# Altium PCB 856.PcbDoc
Units mil, origin at the board's own origin, x right, y up, seen from the top; angles counter-clockwise.
Board outline 3891 x 4990 mil, 4 copper layers (ANALOG, GND, POWER, DIGITAL), stack 30.635 mil thick; 20 components, 53 nets, 248 pads, 0 vias.
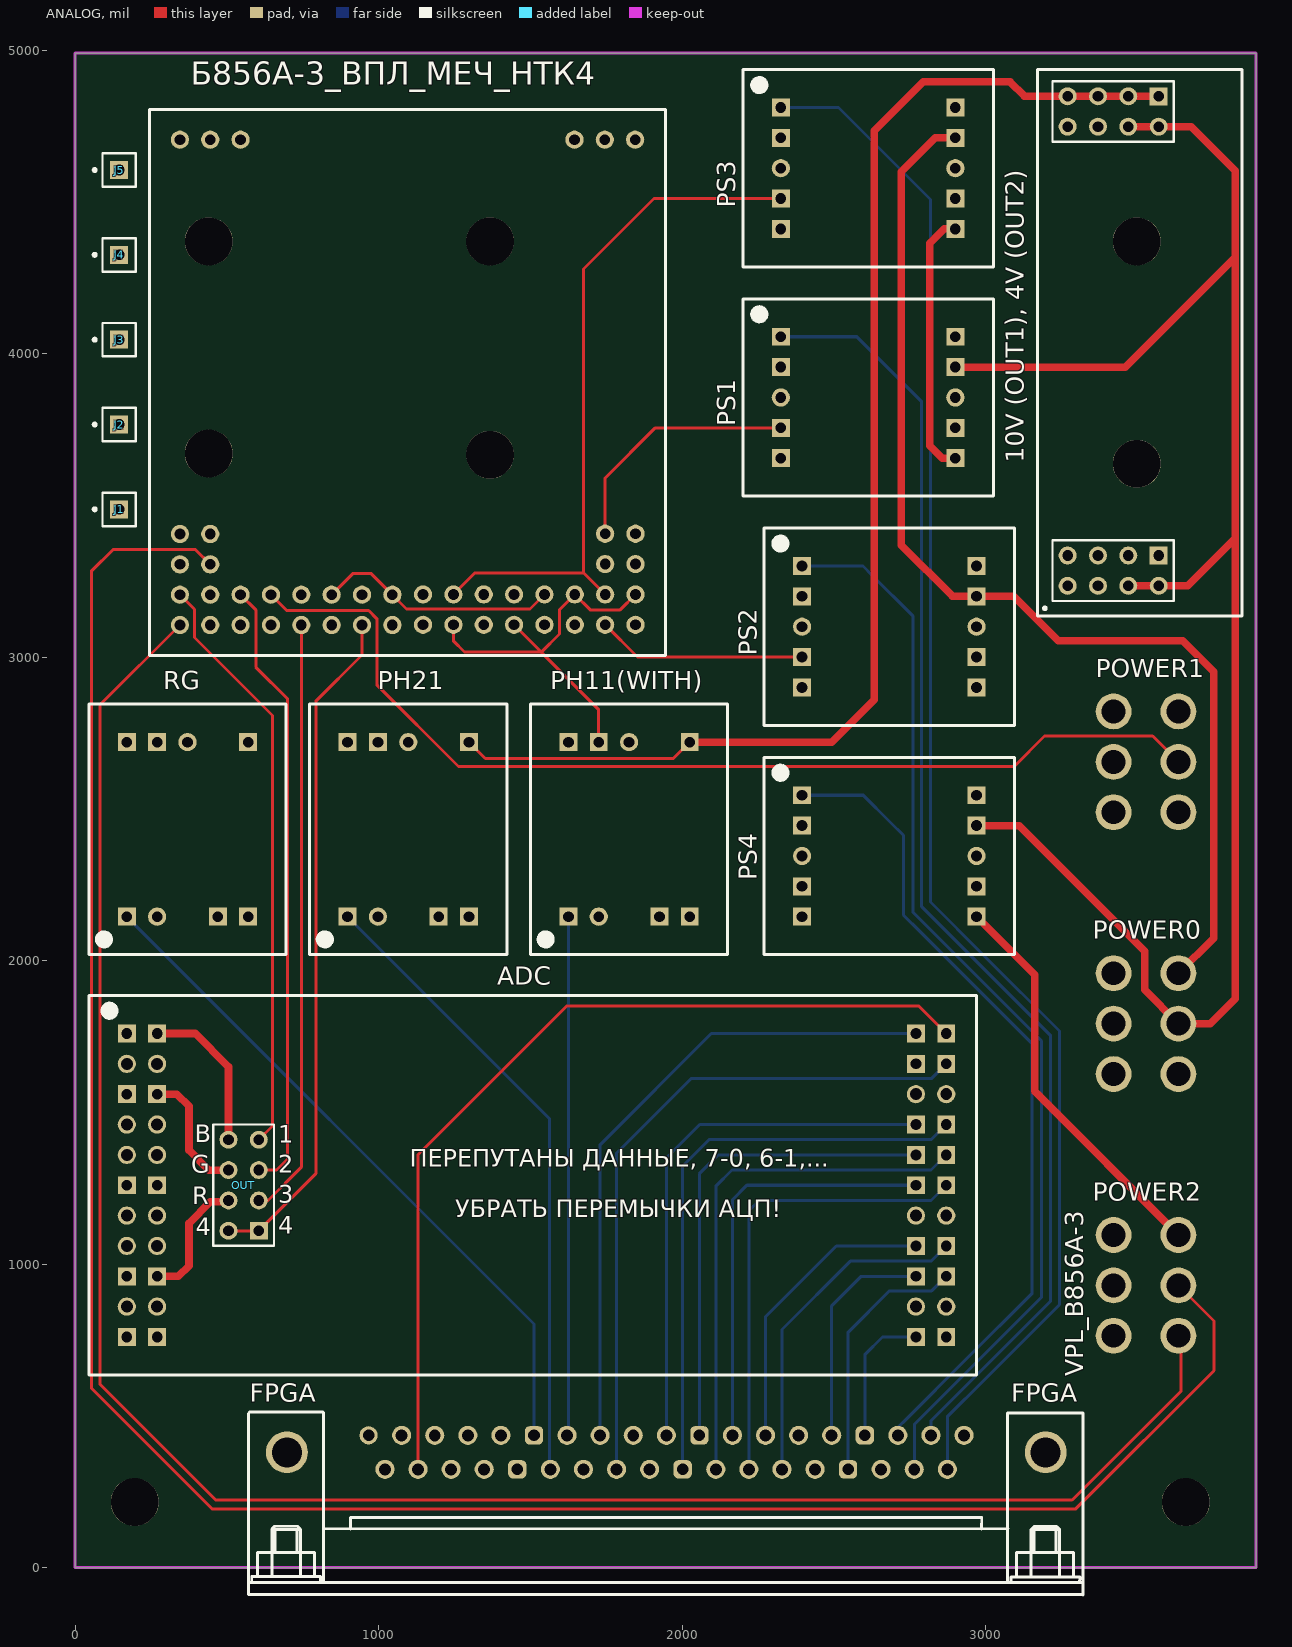
[diagram p0: ANALOG view]
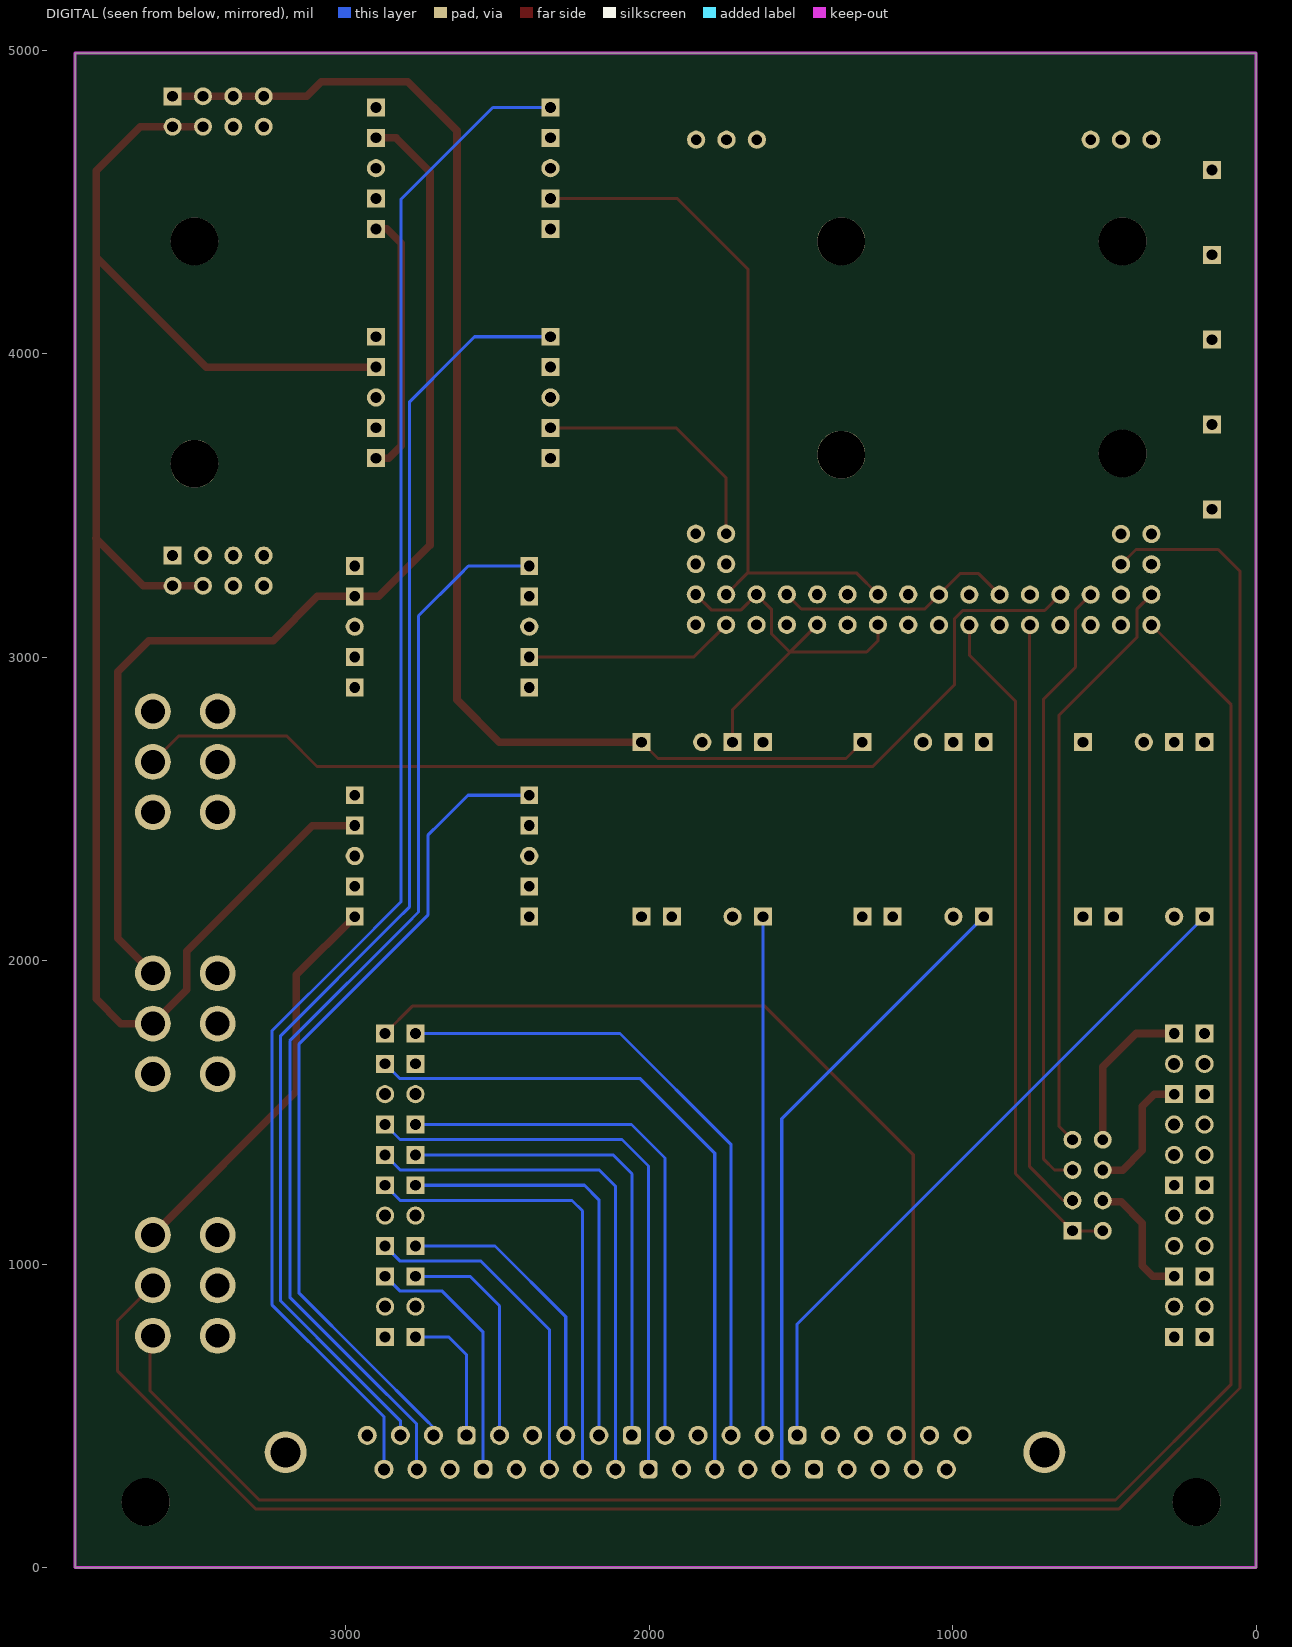
[diagram p1: DIGITAL view, seen from below]
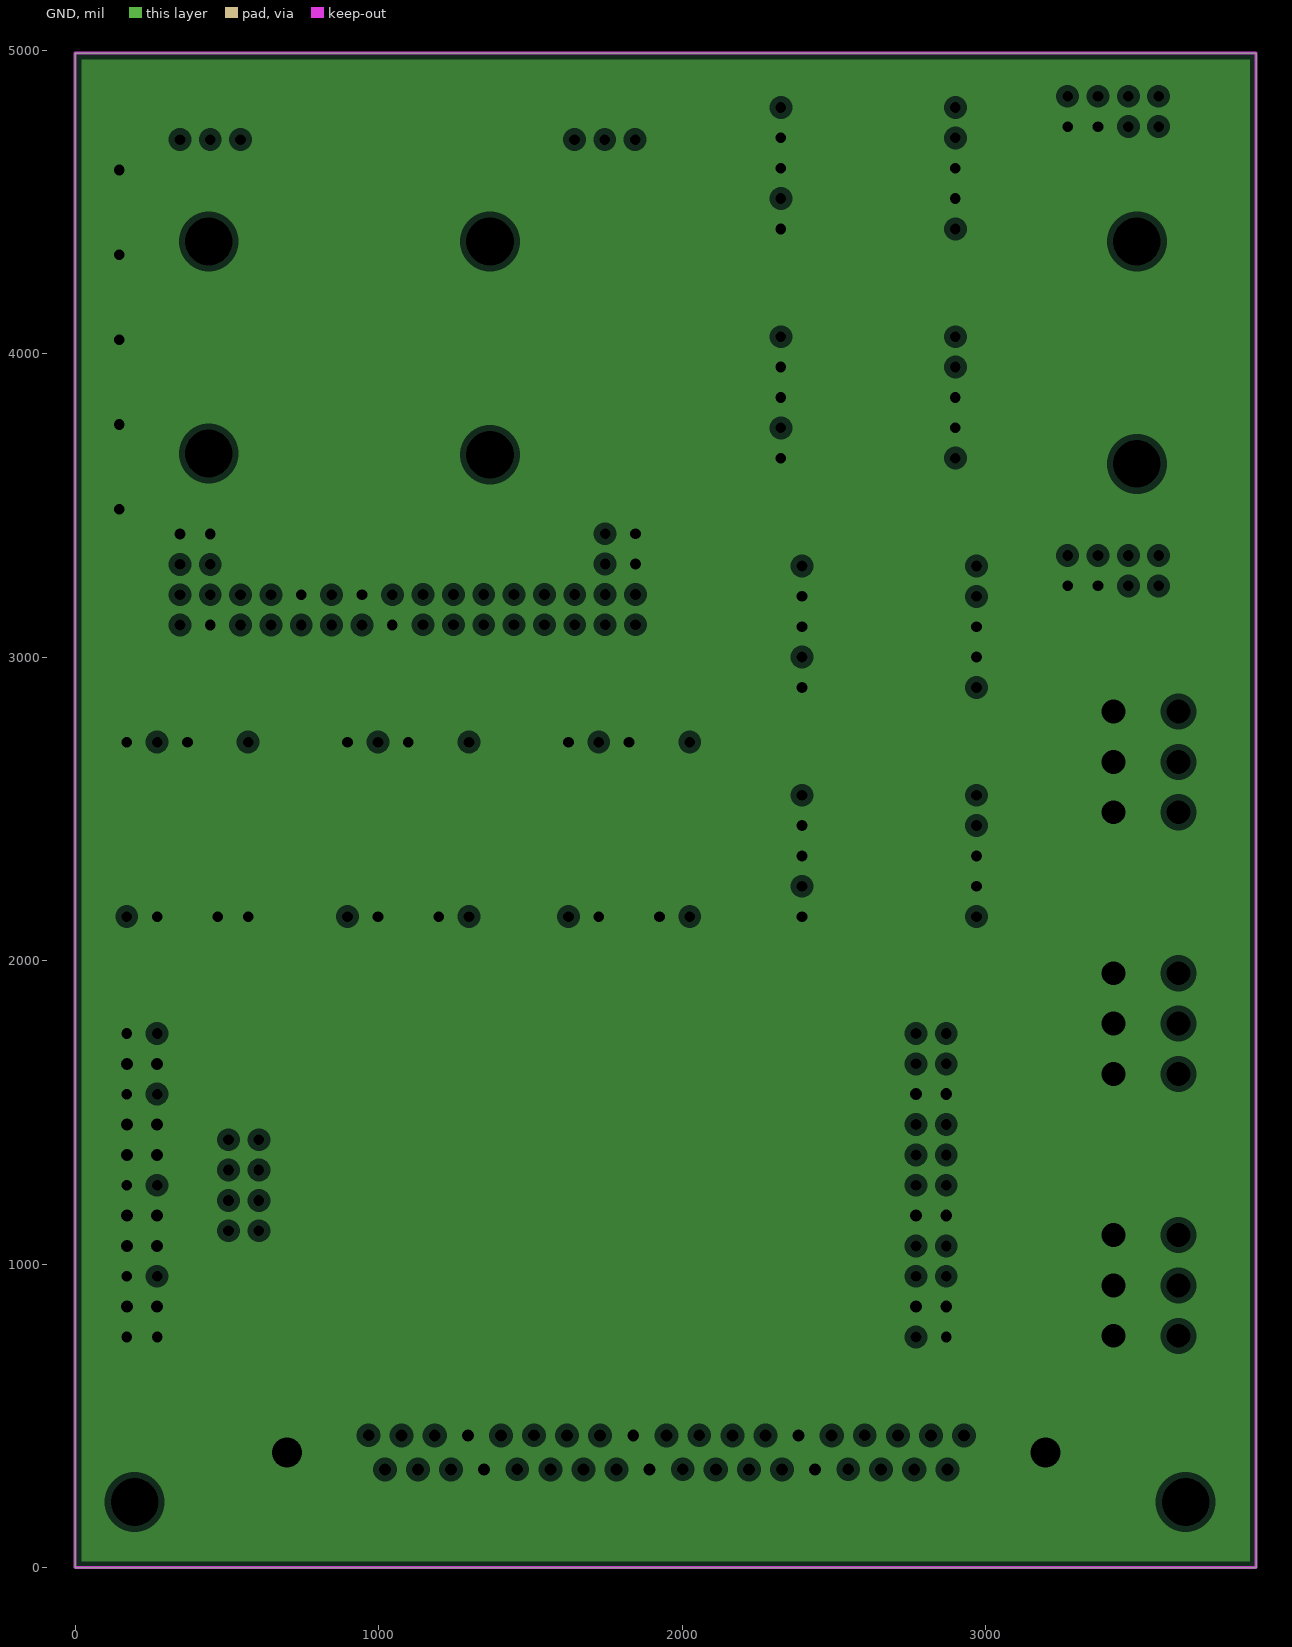
[diagram p2: GND, clearances drawn from the general rule]
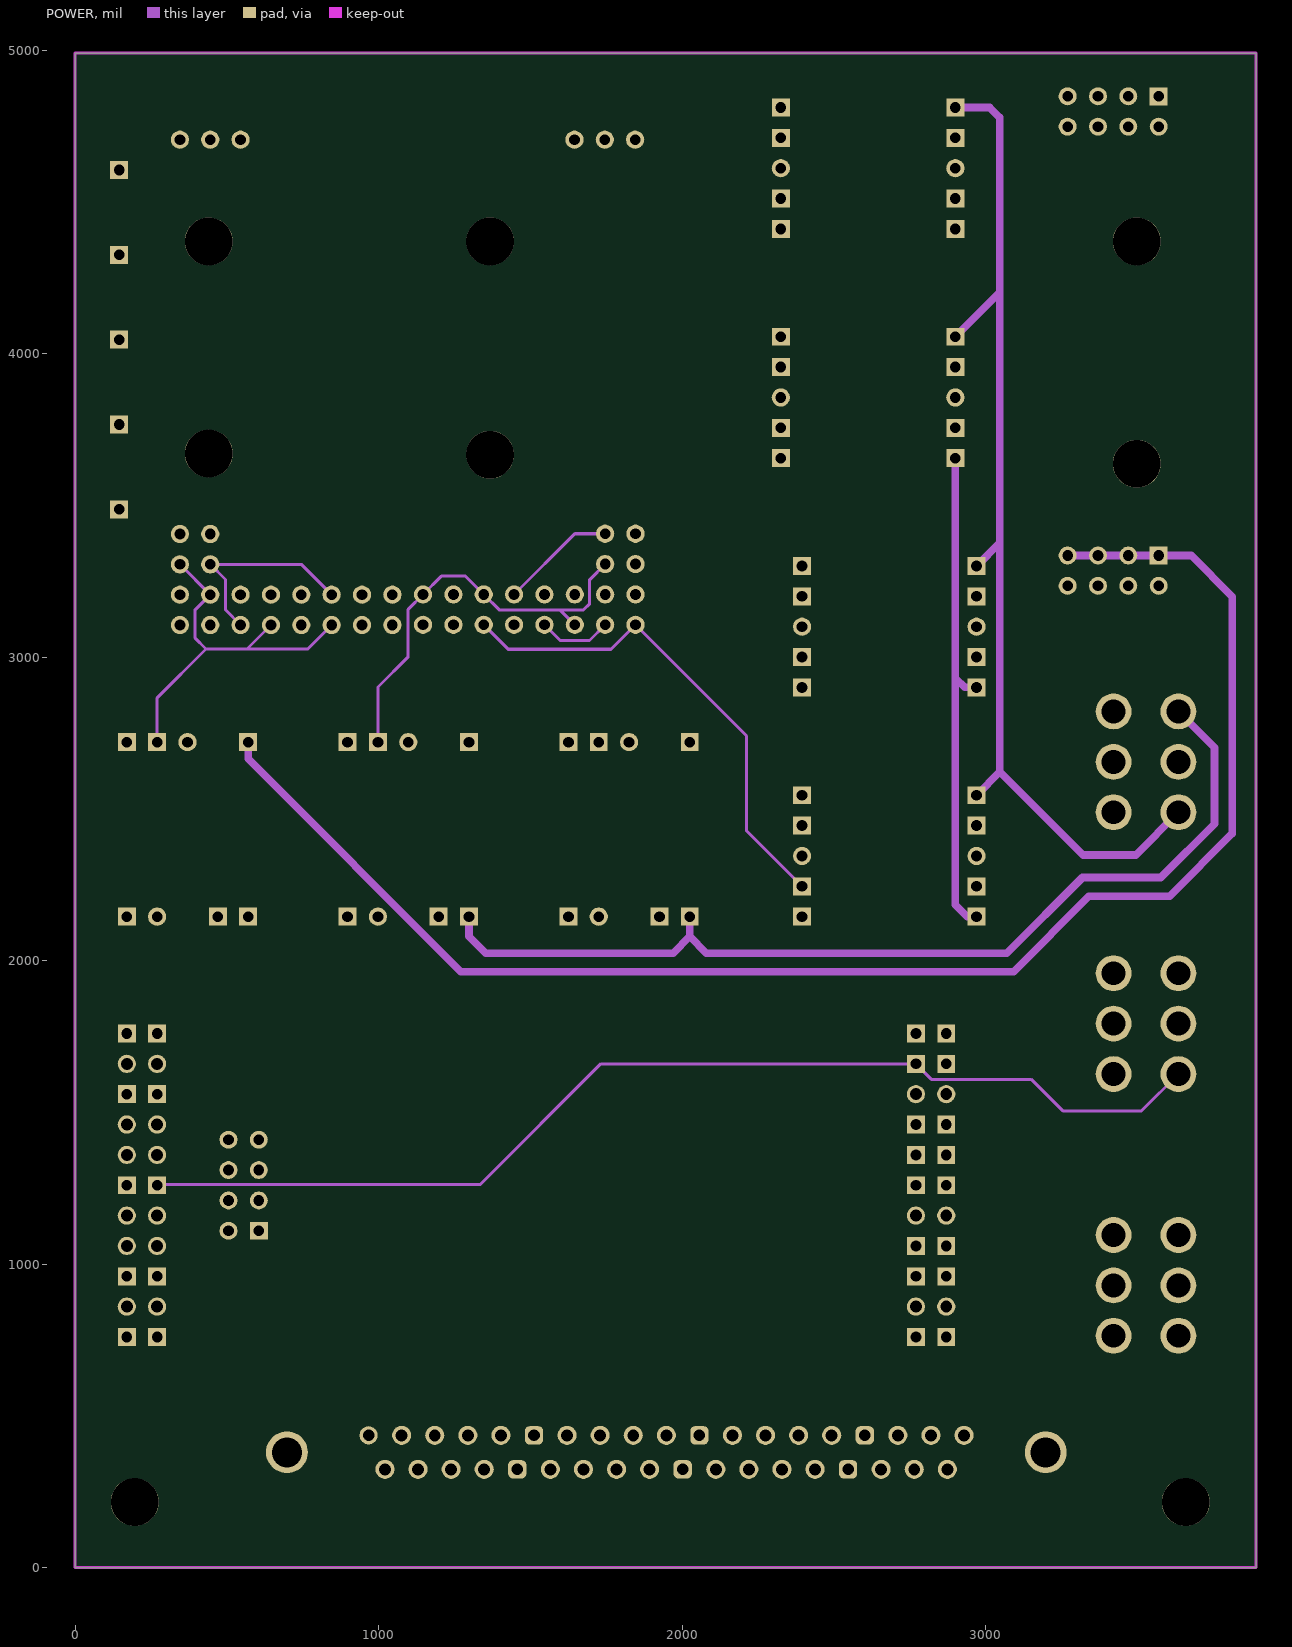
[diagram p3: POWER]

## Layer stack, top to bottom
Top Solder: solder mask 0.4, Solder Resist, Dk 3.5
ANALOG: signal copper 1.4
Dielectric 1: core 10, FR-4, Dk 4.2
GND: plane copper 1.4173, net GND
Dielectric 3: prepreg 5, Dk 4.2
POWER: signal copper 1.4173
Dielectric 2: core 10, Dk 4.2
DIGITAL: signal copper 1.4
Bottom Solder: solder mask 0.4, Solder Resist, Dk 3.5

## Board outline
0,0 0,4990 3891,4990 3891,0

## Design rules (kind name [scope] priority, off if disabled: settings)
Clearance [All] p1: gap=10
PlaneClearance [All] p1: clearance=20
PlaneConnect [All] p1: planeconnectstyle=Relief reliefexpansion=20 reliefentries=4 reliefconductorwidth=10 reliefairgap=10
PolygonConnect [All] p1: connectstyle=Relief reliefconductorwidth=10 reliefentries=4 polygonreliefangle="90 Angle" airgapwidth=10
RoutingVias [All] p1: holewidth=28 width=50 viastyle="Through Hole" minholewidth=28 minwidth=50 maxholewidth=28 maxwidth=50
SolderMaskExpansion [All] p1: expansion=4
Width [All] p1: maxlimit=88.74 minlimit=10 preferedwidth=10
27 further rules are at their usual default settings.

## Components (designator, comment, footprint, x,y, rotation, side; value= is the part's Value field where it differs from the comment)
"10V (OUT1), 4V (OUT2)" "MEZ_POWER" MEZON_POWER_NEW 3270,3235 r90 top
ADC "MEZON_ADC" MEZON_ADC 170,1760 r0 top
FPGA "CHEAP_CON_37_FEMALE" CHEAP_CONN_FEMALE 3197.68,380 r180 top
J1 "Socket" PIN1 145,3487 r90 top
J2 "Socket" PIN1 145,3766.5 r90 top
J3 "Socket" PIN1 145,4046 r90 top
J4 "Socket" PIN1 145,4325.5 r90 top
J5 "Socket" PIN1 145,4605 r90 top
OUT "Header 4X2" HDR2X4 605,1110 r90 top
PH11(WITH) "MEZON_H" MEZON_H 1625,2145 r90 top
PH21 "MEZON_H" MEZON_H 897.5,2145 r90 top
POWER0 "POWER" POWER 3335,1792.5 r270 top
POWER1 "POWER" POWER 3335,2655 r270 top
POWER2 "POWER" POWER 3335,930 r270 top
PS1 "MEZON_V+15" MEZON_V 2325,4055.67 r0 top
PS2 "MEZON_V" MEZON_V 2395,3300.33 r0 top
PS3 "MEZON_V" MEZON_V 2325,4811 r0 top
PS4 "MEZON_V+15" MEZON_V 2395,2545 r0 top
RG "MEZON_H" MEZON_H 170,2145 r90 top
Б856А-3_ВПЛ_МЕЧ_НТК4 "Б856А-3" Dzr_place 345,4705 r0 top (schematic designator 856)

## Footprints (in the part's own frame and the unit in brackets; to place one, negate y for a bottom-side part, rotate by r counter-clockwise, add the part's x,y. Pads: shape width x height; smd on the part's side, far side on the other; paste and mask are expansions set on the pad)
CHEAP_CONN_FEMALE [mm] "CHEAP_CONN_FEMALE"
  round 1.6 hole 1: 1(6.833,-1.422) 2(9.601,-1.422) 3(12.37,-1.422) 5(17.907,-1.422) 6(20.676,-1.422) 7(23.444,-1.422) 8(26.213,-1.422) 10(31.75,-1.422) 11(34.519,-1.422) 12(37.287,-1.422) 13(40.056,-1.422) 15(45.593,-1.422) 16(48.362,-1.422) 17(51.13,-1.422) 18(53.899,-1.422) 20(8.23,1.422) 21(10.998,1.422) 22(13.767,1.422) 24(19.304,1.422) 25(22.073,1.422) 26(24.841,1.422) 27(27.61,1.422) 29(33.147,1.422) 30(35.916,1.422) 31(38.684,1.422) 32(41.453,1.422) 34(46.99,1.422) 35(49.759,1.422) 36(52.527,1.422) 37(55.296,1.422)
  rrect50% 1.524x1.524 hole 0.965: 4(15.138,-1.422) 9(28.981,-1.422) 14(42.824,-1.422) 23(16.535,1.422) 28(30.378,1.422) 33(44.221,1.422)
  round 1.524 hole 0.965: 19(56.667,-1.422)
  round 3.5 hole 2.5: 38(0,0) 39(63.5,0)
  silkscreen extent -3.11,-3.36 66.72,11.92
Dzr_place [mil]
  round 60 hole 35.43: P1(1501.14,-1298.36) P2(1401.14,-1298.36) P15(100,-1299.21) P16(0,-1299.21) R1(1501.14,-1398.36) R2(1401.14,-1398.36) R15(100,-1399.21) R16(0,-1399.21) S1(1501.14,-1498.36) S2(1401.14,-1498.36) S3(1301.14,-1498.36) S4(1201.14,-1498.36) S5(1101.14,-1498.36) S6(1001.14,-1498.36) S7(901.14,-1498.36) S8(801.14,-1498.36) S9(700,-1499.21) S10(600,-1499.21) S11(500,-1499.21) S12(400,-1499.21) S13(300,-1499.21) S14(200,-1499.21) S15(100,-1499.21) S16(0,-1499.21) T1(1501.14,-1598.36) T2(1401.14,-1598.36) T3(1301.14,-1598.36) T4(1201.14,-1598.36) T5(1101.14,-1598.36) T6(1001.14,-1598.36) T7(901.14,-1598.36) T9(700,-1599.21) T10(600,-1599.21) T11(500,-1599.21) T12(400,-1599.21) T13(300,-1599.21) T14(200,-1599.21) T15(100,-1599.21) T16(0,-1599.21) ""(0,0) ""(100,0) ""(200,0) ""(801.14,-1598.36) ""(1300,0) ""(1400,0) ""(1500,0)
  silkscreen extent -100,-1700 1600,100
HDR2X4 [mm] "Connector; Header; 4x2 Position"
  rect 1.5x1.5 hole 0.9: 1(0,0)
  round 1.5 hole 0.9: 2(0,2.54) 3(2.54,0) 4(2.54,2.54) 5(5.08,0) 6(5.08,2.54) 7(7.62,0) 8(7.62,2.54)
  silkscreen extent -1.27,-1.27 8.89,3.81
MEZON_ADC [mm] "MEZON_ADC"
  rect 1.5x1.5 hole 0.9: 1(0,0) 2(2.54,0) 5(0,-5.08) 6(2.54,-5.08) 11(0,-12.7) 12(2.54,-12.7) 17(0,-20.32) 18(2.54,-20.32) 21(0,-25.4) 22(2.54,-25.4) 23(66.04,-25.4) 24(68.58,-25.4) 27(66.04,-20.32) 28(68.58,-20.32) 29(66.04,-17.78) 30(68.58,-17.78) 33(66.04,-12.7) 34(68.58,-12.7) 35(66.04,-10.16) 36(68.58,-10.16) 37(66.04,-7.62) 38(68.58,-7.62) 41(66.04,-2.54) 42(68.58,-2.54) 43(66.04,0) 44(68.58,0)
  round 1.524 hole 1: 3(0,-2.54) 4(2.54,-2.54) 7(0,-7.62) 8(2.54,-7.62) 9(0,-10.16) 10(2.54,-10.16) 13(0,-15.24) 14(2.54,-15.24) 15(0,-17.78) 16(2.54,-17.78) 19(0,-22.86) 20(2.54,-22.86) 25(66.04,-22.86) 26(68.58,-22.86) 31(66.04,-15.24) 32(68.58,-15.24) 39(66.04,-5.08) 40(68.58,-5.08)
  silkscreen extent -3.17,-28.57 71.12,3.17
MEZON_H [mm]
  rect 1.5x1.5 hole 0.9: 1(0,0) 3(0,-7.62) 4(0,-10.16) 5(14.605,-10.16) 7(14.605,-2.54) 8(14.605,0)
  round 1.524 hole 0.9: 2(0,-2.54) 6(14.605,-5.08)
  silkscreen extent -3.18,-13.33 17.78,3.18
MEZON_POWER_NEW [mm]
  round 1.5 hole 0.9: 1(0,0) 1(0,-2.54) 2(0,-5.08) 2(0,-7.62) 3(2.54,-2.54) 3(2.54,0) 3(2.54,-5.08) 4(38.43,-2.54) 4(38.43,0) 5(38.43,-7.62) 5(38.43,-5.08) 6(40.97,-5.08) 6(40.97,-2.54) 6(40.97,0)
  rect 1.5x1.5 hole 0.9: 3(2.54,-7.62) 6(40.97,-7.62)
  silkscreen extent -2.51,-14.6 43.21,2.54
MEZON_V [mm]
  rect 1.5x1.5 hole 0.9: 1(0,0) 2(0,-2.54) 4(0,-7.62) 5(0,-10.16) 6(14.605,-10.16) 7(14.605,-7.62) 9(14.605,-2.54) 10(14.605,0)
  round 1.524 hole 0.9: 3(0,-5.08) 8(14.605,-5.08)
  silkscreen extent -3.17,-13.33 17.78,3.17
PIN1 [mm] "Connector; Plug"
  rect 1.5x1.5 hole 0.9: 1(0,0)
  silkscreen extent -1.4,-1.4 1.4,2.17
POWER [mm] "POWER"
  round 3 hole 2: 1(4.217,7.62) 2(0,7.62) 3(-4.217,7.62) 4(4.217,2.198) 5(0,2.198) 6(-4.217,2.198)

## Part data
"10V (OUT1), 4V (OUT2)": library part MEZON_POWER_NEW
OUT: "Header, 4-Pin, Dual row"
PS1 PS4: library part MEZON_V_+15

## Free pads (board coordinates)
  round 157.48 hole 157.48 unplated mask+0: 0(196,216) 0(440,3671) 0(440,4370) 0(1367,3667) 0(1367,4370) 0(3498,3637) 0(3498,4370) 0(3659,216)

## Nets (pads, with @x,y where several pads share a name; then routed paths per layer and width w, separated by ;. In a path a pad name is that pad's centre, name@x,y a point inside that pad or via, vN(x,y) a via of type N, cw(c..) or ccw(c..) an arc to the next point about the centre after c; other vN are vias at no path point)
1V: POWER1.1 PS1.10 PS2.10 PS3.10 PS4.10 | length 3502.2
  POWER w25: PS1.10 3047,4202.67 ; PS3.10 3014,4811 3047,4778 3047,4202.67 ; PS4.10 3047,2622 ; PS2.10 3047,3377.33 ; POWER1.1 3494.04,2348 3321,2348 3047,2622 ; 3047,2622 3047,3377.33 ; 3047,3377.33 3047,4202.67
2V: POWER2.1 Б856А-3_ВПЛ_МЕЧ_НТК4.T16 | length 6661.2
  ANALOG w10: Б856А-3_ВПЛ_МЕЧ_НТК4.T16 82,2842.79 82,604.01 463.01,223 3285,223 3644,582 POWER2.1@3644,763.96
4V: "10V (OUT1), 4V (OUT2).6" PH11(WITH).5 PH21.5 | length 4336.2
  ANALOG w10: PH21.5 1351.5,2666 1971,2666 2025,2720
  ANALOG w25: 2025,2720 2493,2720 2633,2860 2633,4734 2795,4896 3080,4896 3128,4848 3270,4848 3370,4848 3470,4848 3570,4848
10V: "10V (OUT1), 4V (OUT2).3" RG.5 | length 5156.2
  POWER w25: RG.5 570,2665 1271,1964 3092,1964 3340,2212 3606,2212 3813,2419 3813,3199 3677,3335 3570,3335 3470,3335 3370,3335 3270,3335
14.5V: POWER1.2 Б856А-3_ВПЛ_МЕЧ_НТК4.S13 | length 3428.7
  ANALOG w10: Б856А-3_ВПЛ_МЕЧ_НТК4.S13 696.79,3154 967,3154 994,3127 994,2909 1263,2640 3094,2640 3194,2740 3550,2740 POWER1.2
18.5V: POWER2.2 Б856А-3_ВПЛ_МЕЧ_НТК4.R15 Б856А-3_ВПЛ_МЕЧ_НТК4.S4 Б856А-3_ВПЛ_МЕЧ_НТК4.S9 Б856А-3_ВПЛ_МЕЧ_НТК4.S11 Б856А-3_ВПЛ_МЕЧ_НТК4.T14 | length 8995.4
  ANALOG w10: Б856А-3_ВПЛ_МЕЧ_НТК4.R15 395.79,3355 125,3355 53,3283 53,592 451,194 3297.01,194 3752,648.99 3752,813 POWER2.2 ; Б856А-3_ВПЛ_МЕЧ_НТК4.S11 914.21,3275 975.79,3275 Б856А-3_ВПЛ_МЕЧ_НТК4.S9 1091.79,3159 1498.5,3159 Б856А-3_ВПЛ_МЕЧ_НТК4.S4
  POWER w10: Б856А-3_ВПЛ_МЕЧ_НТК4.T14 495,3155.79 495,3255.79 Б856А-3_ВПЛ_МЕЧ_НТК4.R15 745,3305.79 Б856А-3_ВПЛ_МЕЧ_НТК4.S11
-4V: PH11(WITH).4 PH21.4 POWER1.3 | length 3250.3
  POWER w25: PH21.4 1297.5,2080.5 1353,2025 1970,2025 2025,2080 ; 2025,2145 2025,2080 ; POWER1.3 3754,2702.04 3754,2451 3577,2274 3319,2274 3070,2025 2080,2025 2025,2080
-8V: POWER2.3 PS1.6 PS2.6 PS3.6 PS4.6 | length 3835.9
  ANALOG w25: PS1.6 2857.33,3655.67 2816,3697 2816,4363 2864,4411 PS3.6 ; PS4.6 3162,1953 3162,1569.04 POWER2.3
  POWER w25: PS1.6 2900,2931 ; PS4.6 2939,2145 2900,2184 2900,2931 ; PS2.6 2930.67,2900.33 2900,2931
-15V: POWER0.3 PS2.9 PS3.9 | length 3697.6
  ANALOG w25: PS3.9 2834,4711 2722,4599 2722,3369 2890.67,3200.33 PS2.9 3092.67,3200.33 3239,3054 3649,3054 3751,2952 3751,2074.54 POWER0.3
ADCCLK: ADC.27 FPGA.5 | length 744.3
  DIGITAL w10: FPGA.5 2492.68,862.68 2590,960 ADC.27
CDSCLK1: ADC.23 FPGA.4 | length 458.2
  DIGITAL w10: FPGA.4 2601.68,701.68 2660,760 ADC.23
CDSCLK2: ADC.28 FPGA.23 | length 851.3
  DIGITAL w10: FPGA.23 2546.68,775.68 2683,912 2822,912 ADC.28
D0: ADC.30 FPGA.25 | length 1116
  DIGITAL w10: FPGA.25 2328.68,784.68 2554,1010 2820,1010 ADC.30
D1: ADC.29 FPGA.7 | length 982.6
  DIGITAL w10: FPGA.7 2274.68,826.68 2508,1060 ADC.29
D2: ADC.34 FPGA.26 | length 1536.9
  DIGITAL w10: FPGA.26 2219.68,1175.68 2254,1210 2820,1210 ADC.34
D3: ADC.33 FPGA.8 | length 1400.6
  DIGITAL w10: FPGA.8 2165.68,1212.68 2213,1260 ADC.33
D4: ADC.36 FPGA.27 | length 1734.8
  DIGITAL w10: FPGA.27 2110.68,1256.68 2164,1310 2820,1310 ADC.36
D5: ADC.35 FPGA.9 | length 1600.8
  DIGITAL w10: FPGA.9 2056.68,1297.68 2119,1360 ADC.35
D6: ADC.38 FPGA.28 | length 1924.5
  DIGITAL w10: FPGA.28 2001.68,1323.68 2089,1411 2821,1411 ADC.38
D7: ADC.37 FPGA.10 | length 1781.7
  DIGITAL w10: FPGA.10 1947.68,1349.68 2058,1460 ADC.37
GND: "10V (OUT1), 4V (OUT2).1" "10V (OUT1), 4V (OUT2).4" ADC.1 ADC.3 ADC.4 ADC.5 ADC.7 ADC.8 ADC.9 ADC.10 ADC.11 ADC.13 ADC.14 ADC.15 ADC.16 ADC.17 ADC.19 ADC.20 ADC.21 ADC.22 ADC.24 ADC.25 ADC.26 ADC.31 ADC.32 ADC.39 ADC.40 FPGA.6 FPGA.11 FPGA.16 FPGA.24 FPGA.29 FPGA.34 FPGA.38 FPGA.39 J1.1 J2.1 J3.1 J4.1 J5.1 PH11(WITH).2 PH11(WITH).3 PH11(WITH).6 PH11(WITH).8 PH21.2 PH21.3 PH21.6 PH21.8 POWER0.4 POWER0.5 POWER0.6 POWER1.4 POWER1.5 POWER1.6 POWER2.4 POWER2.5 POWER2.6 PS1.2 PS1.3 PS1.5 PS1.7 PS1.8 PS2.2 PS2.3 PS2.5 PS2.7 PS2.8 PS3.2 PS3.3 PS3.5 PS3.7 PS3.8 PS4.2 PS4.3 PS4.5 PS4.7 PS4.8 RG.2 RG.3 RG.4 RG.6 RG.8 Б856А-3_ВПЛ_МЕЧ_НТК4.P1 Б856А-3_ВПЛ_МЕЧ_НТК4.P15 Б856А-3_ВПЛ_МЕЧ_НТК4.P16 Б856А-3_ВПЛ_МЕЧ_НТК4.R1 Б856А-3_ВПЛ_МЕЧ_НТК4.S10 Б856А-3_ВПЛ_МЕЧ_НТК4.S12 Б856А-3_ВПЛ_МЕЧ_НТК4.T9 Б856А-3_ВПЛ_МЕЧ_НТК4.T15
OS1: OUT.7 Б856А-3_ВПЛ_МЕЧ_НТК4.S16 | length 1940.8
  ANALOG w10: Б856А-3_ВПЛ_МЕЧ_НТК4.S16 393,3157.79 393,3065 650,2808 650,1455 OUT.7
OS2: OUT.5 Б856А-3_ВПЛ_МЕЧ_НТК4.S14 | length 2033.9
  ANALOG w10: Б856А-3_ВПЛ_МЕЧ_НТК4.S14 595,3155.79 595,2967 700,2862 700,1346 664,1310 OUT.5
OS3: OUT.3 Б856А-3_ВПЛ_МЕЧ_НТК4.T12 | length 1972.2
  ANALOG w10: OUT.3 635,1210 746,1321 746,3104.79 Б856А-3_ВПЛ_МЕЧ_НТК4.T12
OS4: OUT.1 OUT.2 Б856А-3_ВПЛ_МЕЧ_НТК4.T10 | length 2236.6
  ANALOG w10: OUT.2 OUT.1 793,1298 793,2855 945,3007 Б856А-3_ВПЛ_МЕЧ_НТК4.T10
P0.0: FPGA.15
P0.1: FPGA.33
P0.2: FPGA.14 RG.1 | length 2264.9
  DIGITAL w10: RG.1 1512,803 FPGA.14@1512,436
P0.3: FPGA.32 PH21.1 | length 2096.7
  DIGITAL w10: PH21.1 1563,1479.5 FPGA.32@1563,324
P0.4: FPGA.13 PH11(WITH).1 | length 1709
  DIGITAL w10: FPGA.13@1625,436 1625,2145
P0.5: FPGA.31
P2.3: FPGA.22
P2.4: FPGA.3 PS4.1 | length 2724.5
  DIGITAL w10: PS4.1 2597,2545 2685,2457 2729,2413 2729,2352 2729,2150 2784,2095 3153,1726 3153,903.84 2933.08,683.92 2738,488.84 2710.68,461.52 FPGA.3
P2.5: FPGA.21 PS2.1 | length 3594.4
  DIGITAL w10: PS2.1 2595.67,3300.33 2624,3272 2760,3136 2760,3081 2760,2160 2799,2121 3184,1736 3184,891 2955,662 2766,473 2766,379 2766,325.32 FPGA.21
P2.6: FPGA.2 PS1.1 | length 4297.9
  DIGITAL w10: PS1.1 2575.33,4055.67 2631,4000 2789,3842 2789,3466 2789,2178 2837,2130 3214,1753 3214,878.57 2976.21,640.79 2819.68,484.25 FPGA.2
P2.7: FPGA.20 PS3.1 | length 5131.5
  DIGITAL w10: PS3.1 2515,4811 2818,4508 2818,2193 2994,2017 3243,1768 3243,866.56 2996.72,620.28 2873.68,497.24 FPGA.20
PFI2: FPGA.17
PFI3: FPGA.35
PH11: PH11(WITH).7 Б856А-3_ВПЛ_МЕЧ_НТК4.S1 Б856А-3_ВПЛ_МЕЧ_НТК4.S3 Б856А-3_ВПЛ_МЕЧ_НТК4.T5 Б856А-3_ВПЛ_МЕЧ_НТК4.T7 | length 1338
  ANALOG w10: Б856А-3_ВПЛ_МЕЧ_НТК4.T7 1246.14,3053.86 1283,3017 1535,3017 ; Б856А-3_ВПЛ_МЕЧ_НТК4.T5@1446.14,3105.86 Б856А-3_ВПЛ_МЕЧ_НТК4.T5 1535,3017.78 1535,3017 ; 1725,2720 1725,2827 1536,3016 ; Б856А-3_ВПЛ_МЕЧ_НТК4.S1 1795.5,3156 1696.78,3156 Б856А-3_ВПЛ_МЕЧ_НТК4.S3 1596,3156.5 1596,3076 1536,3016 ; 1535,3017 1536,3016
PH21: PH21.7 Б856А-3_ВПЛ_МЕЧ_НТК4.R2 Б856А-3_ВПЛ_МЕЧ_НТК4.S6 Б856А-3_ВПЛ_МЕЧ_НТК4.S8 Б856А-3_ВПЛ_МЕЧ_НТК4.T3 | length 1398
  POWER w10: PH21.7 997.5,2901.5 1097,3001 1097,3157.5 Б856А-3_ВПЛ_МЕЧ_НТК4.S8 1206.5,3267 1285.78,3267 Б856А-3_ВПЛ_МЕЧ_НТК4.S6 1396.78,3156 1596.78,3156 ; Б856А-3_ВПЛ_МЕЧ_НТК4.T3 1596.78,3156 ; Б856А-3_ВПЛ_МЕЧ_НТК4.R2 1695,3255.5 1695,3176 1675,3156 1596.78,3156
POWER_ADC: ADC.12 ADC.41 POWER0.1 | length 3645.2
  POWER w10: ADC.12 272,1262 1334,1262 1732,1660 ADC.41 2821,1609 3150,1609 3254,1505 3513.54,1505 POWER0.1
PS1: PS1.4 Б856А-3_ВПЛ_МЕЧ_НТК4.P2 Б856А-3_ВПЛ_МЕЧ_НТК4.S5 | length 1213.8
  ANALOG w10: Б856А-3_ВПЛ_МЕЧ_НТК4.P2 1746.14,3590.14 1911.67,3755.67 PS1.4
  POWER w10: Б856А-3_ВПЛ_МЕЧ_НТК4.S5 1646.14,3406.64 Б856А-3_ВПЛ_МЕЧ_НТК4.P2
PS2: PS2.4 Б856А-3_ВПЛ_МЕЧ_НТК4.T2 Б856А-3_ВПЛ_МЕЧ_НТК4.T4 | length 935.7
  ANALOG w10: Б856А-3_ВПЛ_МЕЧ_НТК4.T2 1852.45,3000.33 PS2.4
  POWER w10: Б856А-3_ВПЛ_МЕЧ_НТК4.T4 1597.78,3055 1694.5,3055 Б856А-3_ВПЛ_МЕЧ_НТК4.T2
PS3: PS3.4 Б856А-3_ВПЛ_МЕЧ_НТК4.S2 Б856А-3_ВПЛ_МЕЧ_НТК4.S7 | length 2306.3
  ANALOG w10: Б856А-3_ВПЛ_МЕЧ_НТК4.S7 1317.5,3278 1674.78,3278 ; Б856А-3_ВПЛ_МЕЧ_НТК4.S2 1674.78,3278 ; PS3.4 1907,4511 1674.78,4278.78 1674.78,3278
PS4: PS4.4 Б856А-3_ВПЛ_МЕЧ_НТК4.T1 Б856А-3_ВПЛ_МЕЧ_НТК4.T6 | length 1655.8
  POWER w10: Б856А-3_ВПЛ_МЕЧ_НТК4.T6 1426.78,3026 1765.5,3026 Б856А-3_ВПЛ_МЕЧ_НТК4.T1 2212,2740.78 2212,2428 PS4.4
RG: RG.7 Б856А-3_ВПЛ_МЕЧ_НТК4.R16 Б856А-3_ВПЛ_МЕЧ_НТК4.S15 Б856А-3_ВПЛ_МЕЧ_НТК4.T11 Б856А-3_ВПЛ_МЕЧ_НТК4.T13 | length 1288.4
  POWER w10: RG.7 270,2866 431,3027 ; Б856А-3_ВПЛ_МЕЧ_НТК4.R16 Б856А-3_ВПЛ_МЕЧ_НТК4.S15 394,3154.79 394,3064 431,3027 ; Б856А-3_ВПЛ_МЕЧ_НТК4.T13 566.21,3027 ; Б856А-3_ВПЛ_МЕЧ_НТК4.T11 766.21,3027 566.21,3027 ; 431,3027 566.21,3027
SCLK: ADC.43 FPGA.12 | length 2149.7
  DIGITAL w10: FPGA.12 1729.68,1393.68 2096,1760 ADC.43
SDATA: ADC.44 FPGA.36 | length 3017
  ANALOG w10: FPGA.36 1129.68,1360.68 1619,1850 2780,1850 ADC.44
SLOAD: ADC.42 FPGA.30 | length 2249.9
  DIGITAL w10: FPGA.30 1783.68,1365.68 2029,1611 2821,1611 ADC.42
"STAB (+15)": "10V (OUT1), 4V (OUT2).2" "10V (OUT1), 4V (OUT2).5" POWER0.2 PS1.9 PS4.9 | length 5924.1
  ANALOG w25: PS1.9 3459.67,3955.67 3820.5,4316.5 ; PS4.9 3110,2445 3524,2031 3524,1903.5 POWER0.2 3740.5,1792.5 3822,1874 3822,4603 3682,4743 ; 3470,3235 3570,3235 3666,3235 3822.5,3391.5 ; 3470,4748 3570,4748 3677,4748 3728,4697
VINB: ADC.2 OUT.8 | length 520.6
  ANALOG w25: ADC.2 395,1760 505,1650 OUT.8
VING: ADC.6 OUT.6 | length 423.5
  ANALOG w25: ADC.6 335,1560 375,1520 375,1375 440,1310 OUT.6
VINR: ADC.18 OUT.4 | length 420.6
  ANALOG w25: ADC.18 340,960 375,995 375,1135 445,1205 500,1205 OUT.4
pads on no net: FPGA.1 FPGA.18 FPGA.19 FPGA.37 Б856А-3_ВПЛ_МЕЧ_НТК4.

## Polygon pours and split planes (outlines as drawn)
GND on GND (split plane): 3870.9,20.1 20.1,20.1 20.1,4969.9 3870.9,4969.9

## Keep-outs
Keep-Out Layer:
  the board outline again, w10

## Silkscreen, mask and mechanical layers (free items; w line width, h text height)
Top Overlay:
  text "B" at 393.86,1382 h99.37
  text "1" at 669.76,1381 h99.37
  text "ПЕРЕПУТАНЫ ДАННЫЕ, 7-0, 6-1,..." at 1102.28,1301 h99.37
  text "G" at 383,1280.77 h99.37
  text "2" at 669.67,1281 h99.37
  text "3" at 669.76,1182.1 h99.37
  text "R" at 386.04,1177.33 h99.37
  text "УБРАТЬ ПЕРЕМЫЧКИ АЦП!" at 1251.6,1134 h99.37
  text "4" at 669.76,1081 h99.37
  text "4" at 397.81,1075 h99.37
  text "VPL_B856A-3" at 3321,631 h60 r90
  text "FPGA" at 3085,547 h60